# Altium PCB PCB.PcbDoc
Units mil, origin at the board's own origin, x right, y up, seen from the top; angles counter-clockwise.
Board outline 1975 x 1040 mil, 4 copper layers (Layer 1 (SIG), Layer 2 (GND), Layer 3 (GND), Layer 4 (SIG)), stack 62.556 mil thick; 48 components, 30 nets, 188 pads, 72 vias.
Unrouted connection lines stored in the file: 1.
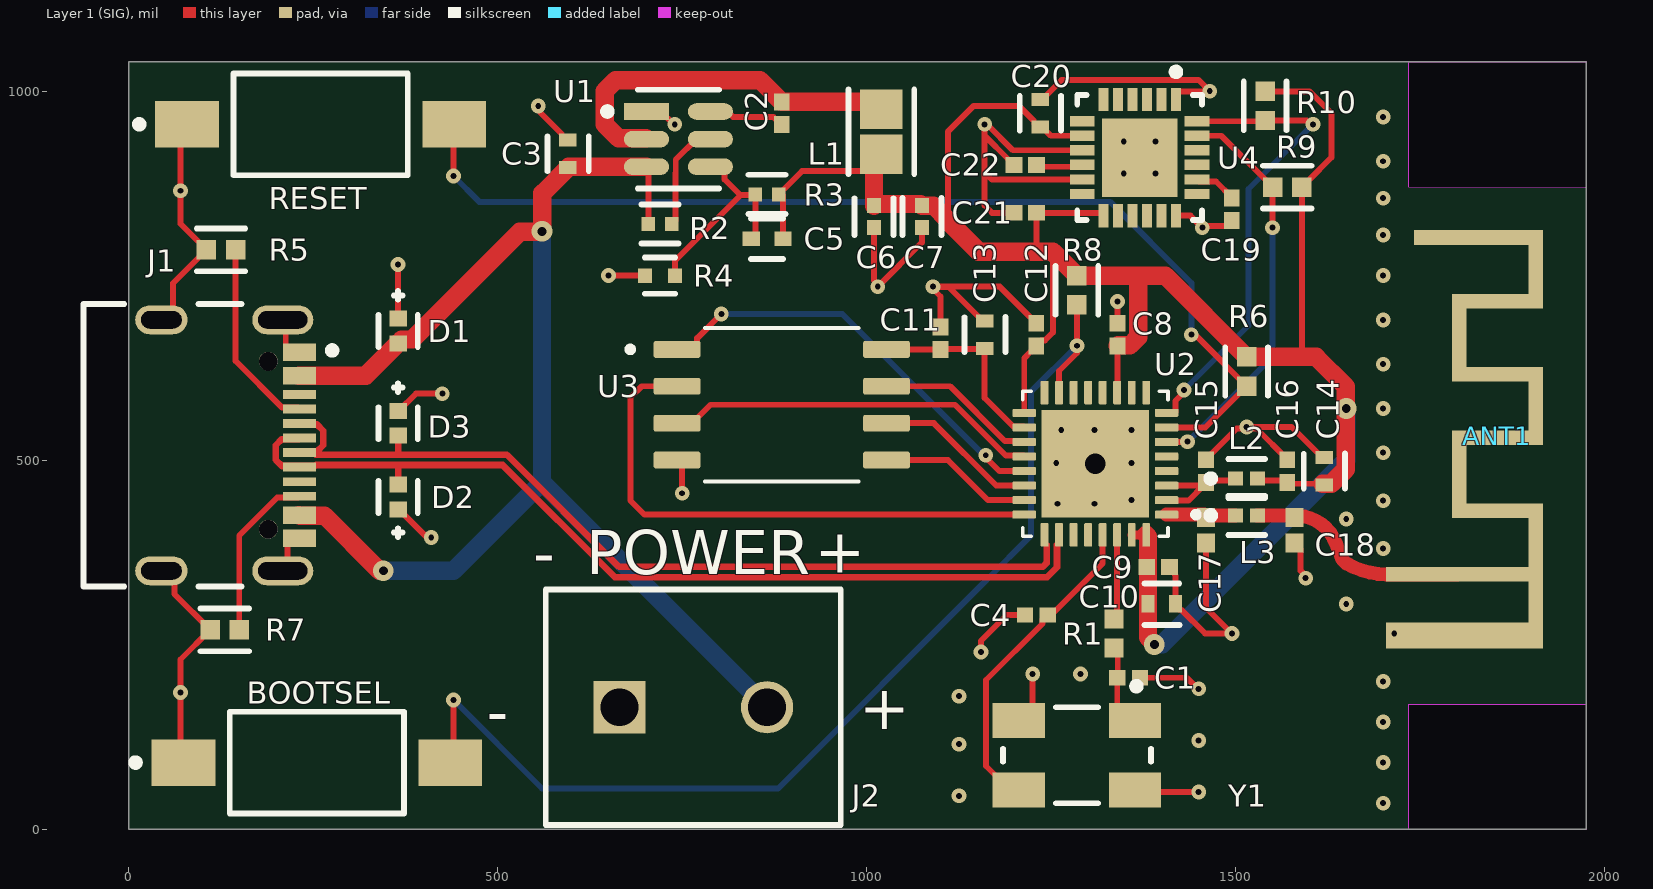
[diagram p0: Layer 1 (SIG) view]
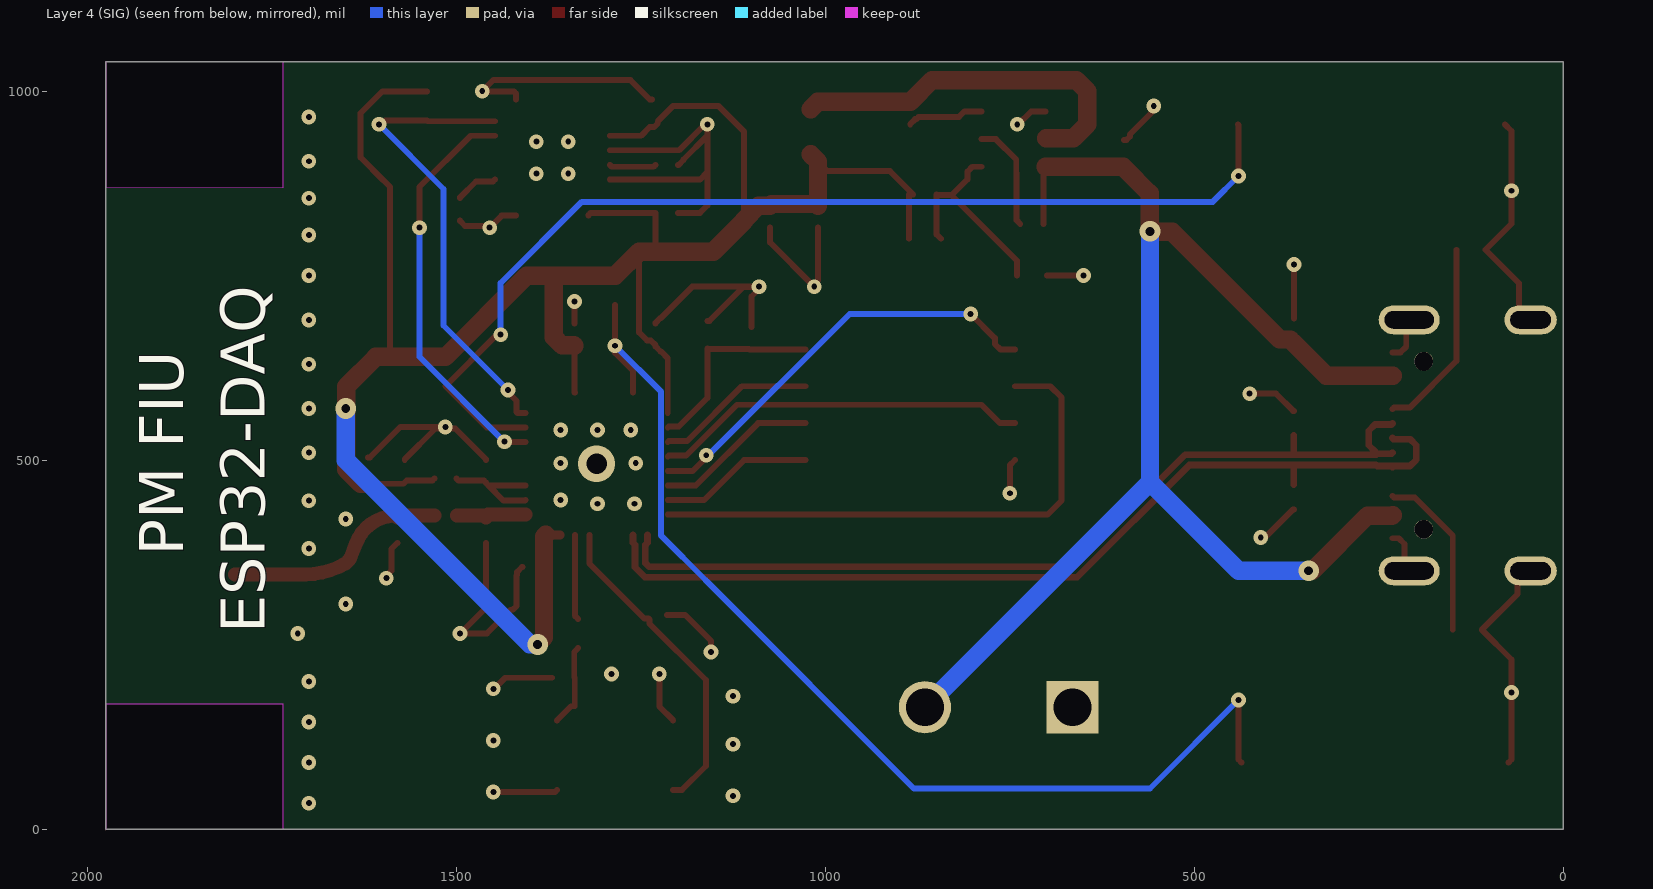
[diagram p1: Layer 4 (SIG) view, seen from below]
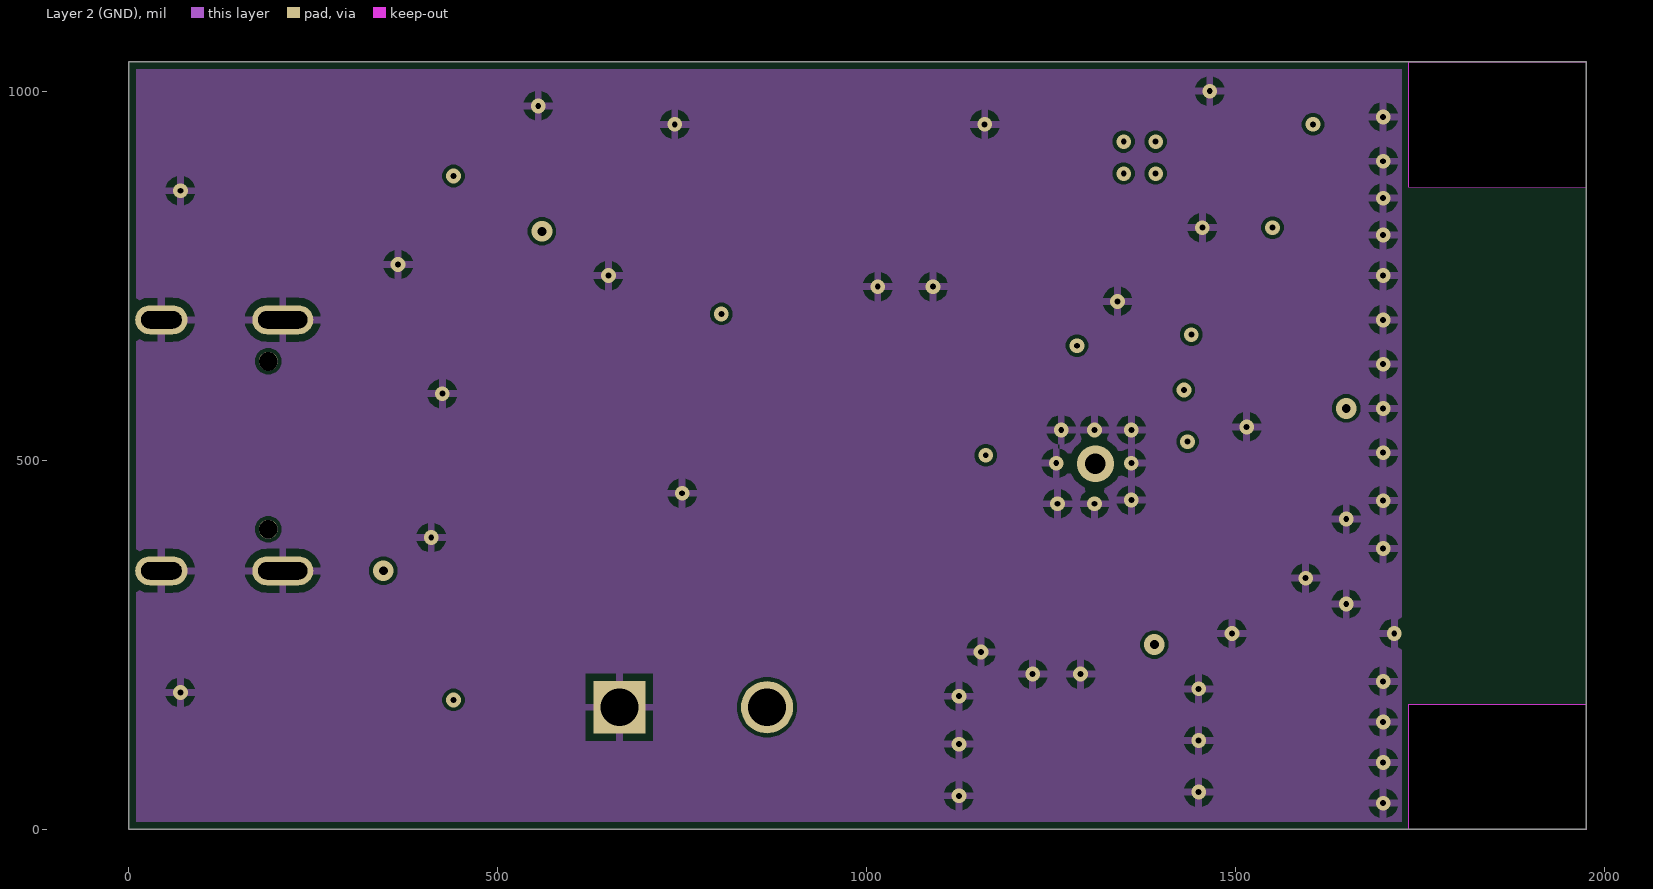
[diagram p2: Layer 2 (GND)]
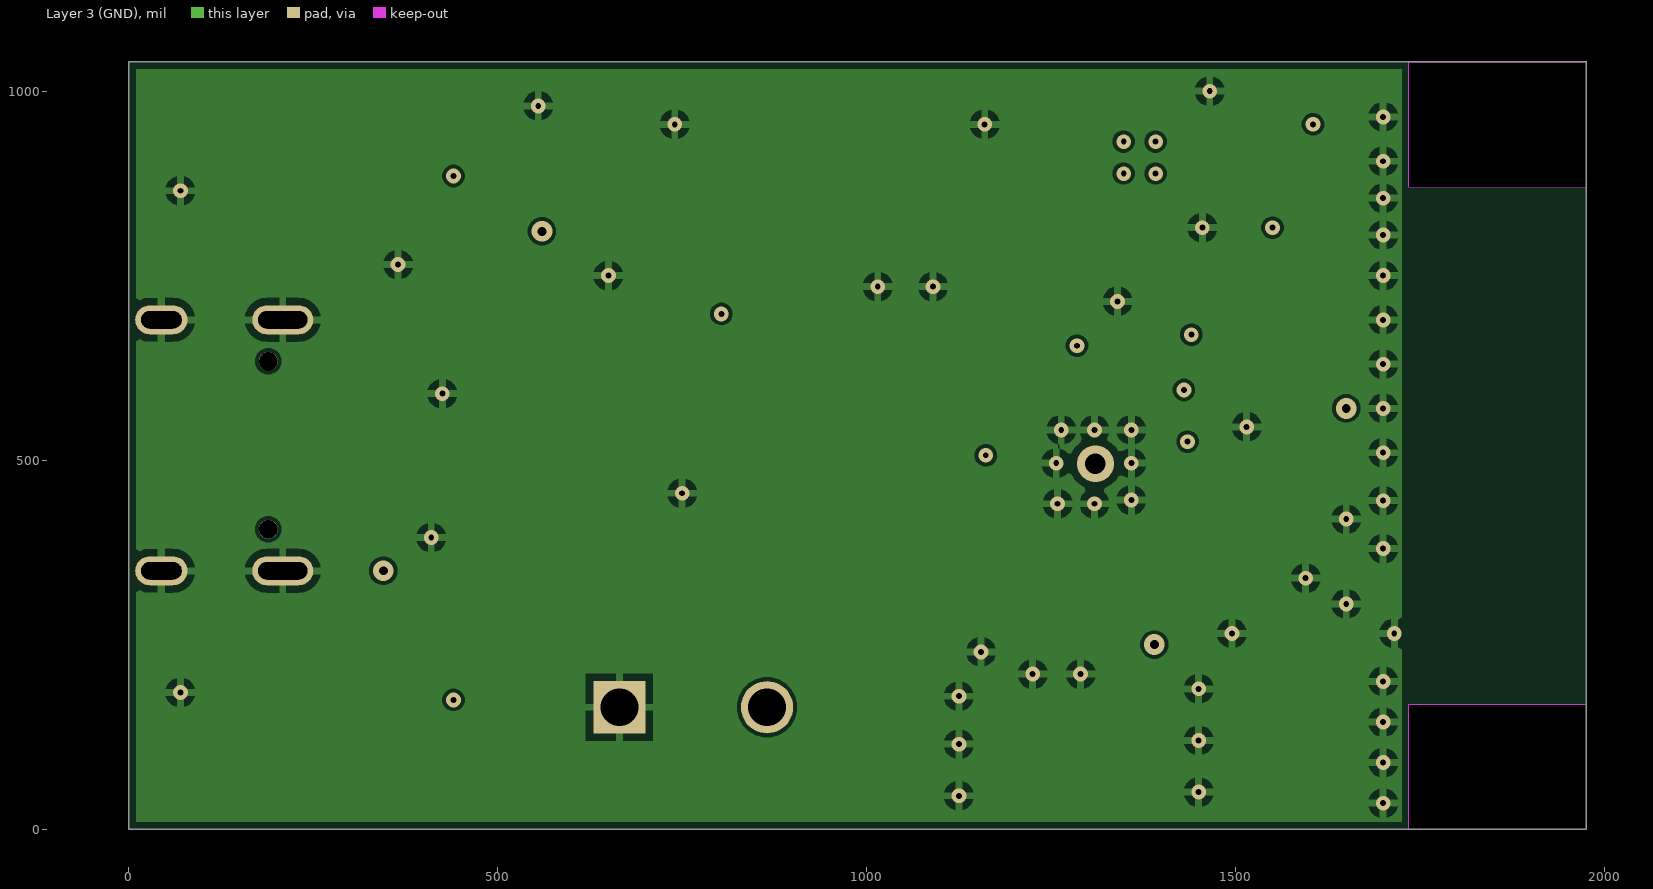
[diagram p3: Layer 3 (GND)]
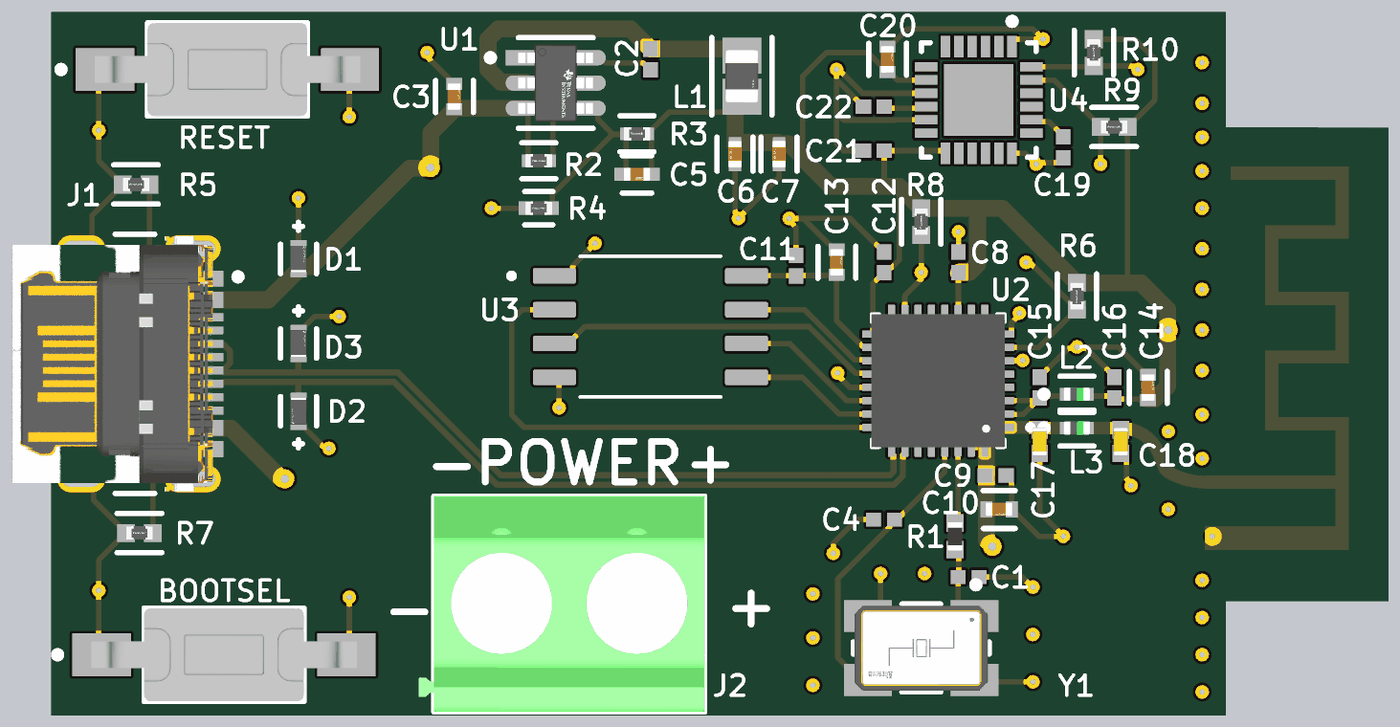
[diagram p4: 3D render of the assembled board from above, using the file's embedded part models]

## Layer stack, top to bottom
Top Solder: solder mask 0.4, Solder Resist, Dk 3.5
Layer 1 (SIG): signal copper 1.4
Dielectric 2: prepreg 10, PP-006, Dk 4.1
Layer 2 (GND): signal copper 1.378
Dielectric 1: dielectric 37, FR-4, Dk 4.8
Layer 3 (GND): signal copper 1.378
Dielectric 3: prepreg 10, PP-006, Dk 4.1
Layer 4 (SIG): signal copper 1.4
Bottom Solder: solder mask 0.4, Solder Resist, Dk 3.5

## Board outline
0,0 0,1040 1975,1040 1975,0
cut-out: 1735,0 1735,169.31 1975,169.31 1975,-1.15
cut-out: 1735,869.98 1735,1032.86 1735,1040 1975,1040 1975,868.82

## Design rules (kind name [scope] priority, off if disabled: settings)
Clearance [All] p1: gap=5 ignorepadtopadclearanceinfootprint=TRUE except(0: Arc-Hole Track-Hole SMDPad-Hole THPad-Hole Via-Hole Fill-Hole Poly-Hole Region-Hole Text-Hole)
DiffPairsRouting [All] p1: maxlimit=10 minlimit=5 mostfreqgap=10 toplayer_maxgap=5 toplayer_prefgap=5 toplayer_minwidth=9 toplayer_maxwidth=9 toplayer_prefwidth=9 midlayer1_mingap=10 midlayer1_minwidth=15 midlayer1_maxwidth=15 midlayer1_prefwidth=15 midlayer2_mingap=10 midlayer2_minwidth=15 midlayer2_maxwidth=15 midlayer2_prefwidth=15 bottomlayer_maxgap=5 bottomlayer_prefgap=5 bottomlayer_minwidth=9 bottomlayer_maxwidth=9 bottomlayer_prefwidth=9 maxuncoupledlength=500
PolygonConnect [All] p1: connectstyle=Relief reliefconductorwidth=10 reliefentries=4 polygonreliefangle="90 Angle" airgapwidth=10
RoutingVias [All] p1: holewidth=12 width=28 viastyle="Through Hole" minholewidth=8 minwidth=20 maxholewidth=28 maxwidth=50
SolderMaskExpansion [All] p1: expansion=4 istentingtop=FALSE
Width [All] p1: maxlimit=25 minlimit=8 preferedwidth=10 toplayer_prefwidth=8 midlayer1_minwidth=10 midlayer1_maxwidth=10 midlayer2_minwidth=10 midlayer2_maxwidth=10 bottomlayer_prefwidth=8 minimp=50.000000 maximp=50.000000 favimp=50.000000
29 further rules are at their usual default settings.

## Classes and differential pairs
differential pair class DATA: DATA
differential pair DATA: +DATA_P -DATA_N

## Components (designator, comment, footprint, x,y, rotation, side; value= is the part's Value field where it differs from the comment)
ANT1 "PCB Antenna 2.4GHz 50Ohm" ANT_IFA_USB_2_4GHZ_50R 1704.06,262.28 r90 top
BOOTSEL "FSMSM" TECO-FSMSM-2_V 255,90 r0 top
C1 "27pF" CAPC1005X55X25LL05T10 1355,205 r0 top
C2 "100nF" CAPC1005X56X25LL10T15 885,970 r270 top
C3 "10uF" FP-GRM15-0_2-MFG 595,915 r90 top
C4 "27pF" CAPC1005X55X25LL05T10 1230,290 r180 top
C5 "56pF" FP-0402-L_1_0_1-W_0_5_0_1-MFG 865,800 r0 top
C6 "22uF" FP-CL746-IPC_C 1010,829.9 r270 top
C7 "22uF" FP-CL746-IPC_C 1075,830 r270 top
C8 "100nF" CAPC1005X56X25LL10T15 1340,670 r90 top
C9 "100nF" CAPC1005X56X25LL10T15 1395,355 r0 top
C10 "10uF" FP-GRM15-0_2-MFG 1400,305 r0 top
C11 "100nF" CAPC1005X56X25LL10T15 1100,665 r90 top
C12 "100nF" CAPC1005X56X25LL10T15 1230,670 r90 top
C13 "10uF" FP-GRM15-0_2-MFG 1160,670 r90 top
C14 "10uF" FP-GRM15-0_2-MFG 1620,485 r90 top
C15 "100nF" CAPC1005X56X25LL10T15 1460,485 r90 top
C16 "100nF" CAPC1005X56X25LL10T15 1570,485 r90 top
C17 "3.3pF" CAPC1005X55X25NL5T10 1460,405 r90 top
C18 "3.3pF" CAPC1005X55X25NL5T10 1580,405 r90 top
C19 "2.2nF" CAPC1005X56X25LL10T15 1495,840 r270 top
C20 "10uF" FP-GRM15-0_2-MFG 1235,970 r90 top
C21 "100nF" CAPC1005X56X25LL10T15 1215,835 r180 top
C22 "100nF" CAPC1005X56X25LL10T15 1215,900 r180 top
D1 "" FP-SLP1006P2-MFG 365,675 r270 top
D2 "" FP-SLP1006P2-MFG 365,450 r90 top
D3 "" FP-SLP1006P2-MFG 365,550 r270 top
J1 "USB4105-GF-A" FP-USB4105-GF-A-MFG 90,520 r270 top
J2 "" PHOE-1729128-2_V 765,165 r0 top
L1 "15uH" FP-MLZ2012-1_25-IPC_B 1020,945 r270 top
L2 "2.2nH" FP-LQG15HH_02-IPC_C 1515,475 r0 top
L3 "2.2nH" FP-LQG15HH_02-IPC_C 1515,425 r0 top
R1 "22R" RESC1005X40X25ML05T05 1335,265 r90 top
R2 "100K" FP-ERJ2RK-IPC_C 720,820 r0 top
R3 "100K" FP-ERJ2RK-IPC_C 865,860 r0 top
R4 "22K" FP-ERJ2RK-MFG 720,750 r0 top
R5 "5K1" FP-ERJ2RK-IPC_A 125,785 r0 top
R6 "5K1" FP-ERJ2RK-IPC_A 1515,620 r90 top
R7 "5K1" FP-ERJ2RK-IPC_A 130,270 r0 top
R8 "5K1" FP-ERJ2RK-IPC_A 1285,730 r90 top
R9 "5K1" FP-ERJ2RK-IPC_A 1570,870 r0 top
R10 "5K1" FP-ERJ2RK-IPC_A 1540,980 r90 top
RESET "FSMSM" TECO-FSMSM-2_V 260,955 r0 top
U1 "TPS54202DDCR" FP-DDC0006A-IPC_B 745,935 r0 top
U2 "ESP32C3" QFN32_5X5MM 1310,495 r180 top
U3 "W25Q128JVSIQ" SOIC127P790X216-8N 885,575 r0 top
U4 "MPU-6050" IS-QFN-24_V 1370,910 r270 top
Y1 "40MHz" FP-ABM3B-MFG 1285,100 r180 top

## Footprints (in the part's own frame and the unit in brackets; to place one, negate y for a bottom-side part, rotate by r counter-clockwise, add the part's x,y. Pads: shape width x height; smd on the part's side, far side on the other; paste and mask are expansions set on the pad)
ANT_IFA_USB_2_4GHZ_50R [mm]
  rect 5x0.5 smd paste-2539.97 mask+0.102: 1(2.05,-5.15)
  rect 0.5x4.9 smd paste-2539.97 mask+0.102: 1(2.1,-2.45)
  rect 0.5x2.64 smd paste-2539.97 mask+0.102: 1(4.3,-3.58) 1(6.8,-3.58) 1(9,-3.58) 1(11.5,-3.58)
  rect 2x0.5 smd paste-2539.97 mask+0.102: 1(5.55,-2.51) 1(10.25,-2.51)
  rect 2.7x0.5 smd paste-2539.97 mask+0.102: 1(7.9,-5.15) 1(12.6,-5.15)
  rect 0.5x3.94 smd paste-2539.97 mask+0.102: 1(13.7,-2.93)
  rect 0.9x4.9 smd paste-2539.97 mask+0.102: 2(0,-2.45)
CAPC1005X55X25LL05T10 [mm] "Chip Capacitor, 2-Leads, Body 1.00x0.50mm, IPC High Density"
  rect 0.56x0.52 smd: 1(-0.39,0) 2(0.39,0)
  body extent -0.53,-0.28 0.53,0.28, height 0.55
CAPC1005X55X25NL5T10 [mm] "Chip Capacitor, 2-Leads, Body 1.05x0.55mm, IPC Medium Density"
  rect 0.66x0.62 smd: 1(-0.44,0) 2(0.44,0)
  body extent -0.53,-0.28 0.53,0.28, height 0.55
CAPC1005X56X25LL10T15 [mm] "Chip Capacitor, 2-Leads, Body 1.00x0.50mm, IPC High Density"
  rect 0.58x0.54 smd: 1(-0.39,0) 2(0.39,0)
  body extent -0.55,-0.3 0.55,0.3, height 0.56
FP-0402-L_1_0_1-W_0_5_0_1-MFG [mm]
  rect 0.6x0.5 smd paste+0 mask+0: 1(-0.55,0) 2(0.55,0)
  silkscreen extent -0.55,-0.7 0.55,0.7, body extent -0.95,-0.4 0.95,0.4, height 0.25
FP-ABM3B-MFG [mm]
  rect 1.8x1.2 smd paste+0 mask+0: 1(-2,-1.2) 2(2,-1.2) 3(2,1.2) 4(-2,1.2)
  silkscreen extent -2.55,-2.5 2.55,1.65, body extent -3,-1.9 3,1.9, height 0.25
FP-CL746-IPC_C [mil]
  rect 20.29x18.6 smd paste+0 mask+0: 1(-14.9,0) 2(14.9,0)
  silkscreen extent -25,-27 25,27, body extent -29,-15 29,15, height 10
FP-DDC0006A-IPC_B [mm]
  rect 1.554x0.572 smd paste+0 mask+0: 1(-1.1,0.95)
  rrect100% 1.554x0.572 smd paste+0 mask+0: 2(-1.1,0) 3(-1.1,-0.95) 4(1.1,-0.95) 5(1.1,0) 6(1.1,0.95)
  silkscreen extent -2.57,-1.7 1.4,1.7, body extent -2.13,-1.7 2.13,1.7, height 0.25
FP-ERJ2RK-IPC_A [mil]
  rect 26.31x26.48 smd paste+0 mask+0: 1(-19.77,0) 2(19.77,0)
  silkscreen extent -33,-29 33,29, body extent -41,-21 41,21, height 10
FP-ERJ2RK-IPC_C [mil]
  rect 18.43x18.6 smd paste+0 mask+0: 1(-15.83,0) 2(15.83,0)
  silkscreen extent -25,-27 25,27, body extent -29,-15 29,15, height 10
FP-ERJ2RK-MFG [mm]
  rect 0.475x0.5 smd paste+0 mask+0: 1(-0.513,0) 2(0.513,0)
  silkscreen extent -0.53,-0.63 0.53,0.63, body extent -0.85,-0.38 0.85,0.38, height 0.25
FP-GRM15-0_2-MFG [mm]
  rect 0.45x0.6 smd paste+0 mask+0: 1(-0.475,0) 2(0.475,0)
  silkscreen extent -0.6,-0.72 0.61,0.7, body extent -0.8,-0.45 0.8,0.45, height 0.25
FP-LQG15HH_02-IPC_C [mil]
  rect 20.29x18.6 smd paste+0 mask+0: 1(-14.9,0) 2(14.9,0)
  silkscreen extent -54,-27 25,27, body extent -29,-15 29,15, height 10
FP-MLZ2012-1_25-IPC_B [mil]
  rect 53.32x57.33 smd paste+0 mask+0: 1(-30.55,0) 2(30.55,0)
  silkscreen extent -57,-44 57,44, body extent -67,-39 67,39, height 10
FP-SLP1006P2-MFG [mm]
  rect 0.55x0.6 smd paste+0 mask+0: 1(-0.425,0) 2(0.425,0)
  silkscreen extent -1.38,-0.67 0.55,0.67, body extent -0.8,-0.45 0.8,0.45, height 0.25
FP-USB4105-GF-A-MFG [mm]
  rrect100% 1x2.1 hole 1.7 slot 0.6 at 0 deg paste-2539.97 mask+0: 1(-4.32,3.015) 2(4.32,3.015)
  rrect100% 1x1.8 hole 1.4 slot 0.6 at 0 deg paste-2539.97 mask+0: 3(-4.32,-1.165) 4(4.32,-1.165)
  rect 0.6x1.15 smd paste+0 mask+0: A1-B12(-3.2,3.59) A4-B9(-2.4,3.59) B1-A12(3.2,3.59) B4-A9(2.4,3.59)
  rect 0.3x1.15 smd paste+0 mask+0: A5(-1.25,3.59) A6(-0.25,3.59) A7(0.25,3.59) A8(1.25,3.59) B5(1.75,3.59) B6(0.75,3.59) B7(-0.75,3.59) B8(-1.75,3.59)
  round 0.65 hole 0.65 unplated paste-2539.97 mask+0: ""(-2.89,2.515) ""(2.89,2.515)
  silkscreen extent -4.86,-3.84 4.86,4.84, body extent -4.96,-3.94 4.96,4.27, height 0.25
IS-QFN-24_V [mm] "QFN, 24-Leads, Body 4x4mm, Pitch 0.5mm, Thermal Pad 2.7x2.6mm"
  rect 0.8x0.35 smd: 1(-2,1.25) 2(-2,0.75) 3(-2,0.25) 4(-2,-0.25) 5(-2,-0.75) 6(-2,-1.25) 13(2,-1.25) 14(2,-0.75) 15(2,-0.25) 16(2,0.25) 17(2,0.75) 18(2,1.25)
  rect 0.35x0.85 smd mask+0.102: 7(-1.25,-1.975) 8(-0.75,-1.975) 9(-0.25,-1.975) 10(0.25,-1.975) 11(0.75,-1.975) 12(1.25,-1.975) 19(1.25,1.975) 20(0.75,1.975) 21(0.25,1.975) 22(-0.25,1.975) 23(-0.75,1.975) 24(-1.25,1.975)
  rect 2.7x2.6 smd: 25(0,0)
  silkscreen extent -3.07,-2.15 2.15,2.15, body extent -2,-2 2,2, height 0.95
PHOE-1729128-2_V [mm] "Receptacle, 2-Leads, Body 8.1x10.16mm, Pitch 5.08mm"
  rect 1.8x1.8 hole 1.3: 1(-2.54,0)
  round 1.8 hole 1.3: 2(2.54,0)
  silkscreen extent -5.08,-4.05 5.08,4.05, body extent -5.65,-4.05 5.08,4.05, height 10.01
QFN32_5X5MM [mm]
  rrect25% 0.81x0.27 smd: 1(-2.45,1.75) 2(-2.45,1.25) 3(-2.45,0.75) 4(-2.45,0.25) 5(-2.45,-0.25) 6(-2.45,-0.75) 7(-2.45,-1.25) 8(-2.45,-1.75) 17(2.45,-1.75) 18(2.45,-1.25) 19(2.45,-0.75) 20(2.45,-0.25) 21(2.45,0.25) 22(2.45,0.75) 23(2.45,1.25) 24(2.45,1.75)
  rrect25% 0.27x0.81 smd: 9(-1.75,-2.45) 10(-1.25,-2.45) 11(-0.75,-2.45) 12(-0.25,-2.45) 13(0.25,-2.45) 14(0.75,-2.45) 15(1.25,-2.45) 16(1.75,-2.45) 25(1.75,2.45) 26(1.25,2.45) 27(0.75,2.45) 28(0.25,2.45) 29(-0.25,2.45) 30(-0.75,2.45) 31(-1.25,2.45) 32(-1.75,2.45)
  rect 3.7x3.7 smd paste-1.4: 33(0,0)
  silkscreen extent -3.56,-2.5 2.5,2.5, body extent -2.5,-2.5 2.5,2.5, height 0.9
RESC1005X40X25ML05T05 [mm] "Chip Resistor, 2-Leads, Body 1.05x0.55mm, IPC Low Density"
  rect 0.65x0.65 smd: 1(-0.5,0) 2(0.5,0)
  body extent -0.53,-0.28 0.53,0.28, height 0.4
SOIC127P790X216-8N [mm]
  rrect25% 1.61x0.58 smd: 1(-3.605,1.905) 2(-3.605,0.635) 3(-3.605,-0.635) 4(-3.605,-1.905) 5(3.605,-1.905) 6(3.605,-0.635) 7(3.605,0.635) 8(3.605,1.905)
  silkscreen extent -5.31,-2.64 2.64,2.64
TECO-FSMSM-2_V [mm] "SMD, 2-Leads, Body 6x3.5mm, Pitch 9.19mm"
  rect 2.2x1.6 smd: 1(-4.595,0)
  rect 2.18x1.6 smd: 2(4.595,0)
  silkscreen extent -6.37,-1.75 3,1.75, body extent -4.98,-1.75 4.98,1.75, height 4.4

## Part data
ANT1: library part ANT_IFA_USB_2_4GHZ_50R, "Inverted F 2.4GHz ISM PCB Antenna 50 Ohm", ComponentLink1Description=Datasheet, ComponentLink1URL=https://www.ti.com/lit/an/swra117d/swra117d.pdf
BOOTSEL RESET: library part CMP-2000-07511-1, "FSMSM Push Button Switch, 50 mA, -35 to 85 degC, 2-Pin SMD, RoHS, Bulk", Case\/Package=SMD/SMT, Contact Current Rating=50mA, Contact Resistance=100mOhm, Manufacturer="TE Connectivity", Max Operating Temperature=85degC, Max Voltage Rating (DC)=12V, Min Operating Temperature=-35degC, Operating Force=180gf, Package Description="2-Pin Surface Mount Device, Body 6 x 3.5 mm, Pitch 9.19 mm", Package Quantity=1000, Voltage Rating (DC)=24V, Actuator Length=1.07mm, Actuator Material=Polyamide, Contact Material=Brass, Contact Plating=Silver, Current Rating=50mA, Datasheet URL=http://www.te.com/commerce/DocumentDelivery/DDEController?Action=showdoc&DocId=Customer+Drawing%7F1437566-3%7FC2%7Fpdf%7FEnglish%7FENG_CD_1437566-3_C2_1437566_3_1_c.dwg.pdf%7F1437566-3, Datasheet Version="Rev. C2, 08/2014", Electrical Life=20000Cycles, ELV=Compliant, Illumination Type=Illuminated, Lead Free=LeadFree, Manufacturer URL=http://www.te.com/, Mechanical Life=20000Cycles, Mount=SurfaceMount, Mounting Technology=SurfaceMount, Orientation=Straight, Package Reference=FSMSM, Packaging=LoosePiece, REACH SVHC=Unknown, RoHSCompliant=true, Switch Travel=0.25mm, Termination=GullWing, Throw Configuration=SPST
C1 C4: library part CMP-2008-03917-1, Manufacturer=Murata, Part Number=GRM1555C1H270JA01D
C2 C8 C9 C11 C12 C15 C16 C21 C22: library part CMP-2008-02743-1, Manufacturer="AVX Interconnect / Elco", Part Number=04026D104KAT2A
C3 C10 C13 C14 C20: library part CMP-06035-000074-1, "CAP CER 10UF 6.3V X6S 0402", Manufacturer=Murata, Manufacturer Part Number=GRM155C80J106ME11D, Package=GRM15-0.2, Temperature="-55°C to +105°C", Temperature Characteristic=X6S, Temperature Coefficient=22%, Temperature Range High=+105°C, Temperature Range Low=-55°C, Tolerance=20%, Voltage Rating=6.3V, Automotive=No, Capacitance=10uF, Category=Cap, ComponentLink2Description=Datasheet, ComponentLink2URL=https://search.murata.co.jp/Ceramy/image/img/A01X/G101/ENG/GRM155C80J106ME11-01.pdf, Device Class L1="Passive Components", Device Class L2=Capacitors, Device Class L3="Ceramic Capacitors", Digikey Description="CAP CER 10UF 6.3V X6S 0402", Height=0.7mm, Ipc Land Pattern Name=CAPC10050X50, Lead Free=Yes, Material=Ceramic, Mouser Description="Cap Ceramic 10uF 6.3V X6S 20% Pad SMD 0402 105C T/R", Octopart=https://octopart.com/grm155c80j106me11d-murata-71220993, RoHS=TRUE
C5: library part CMP-2008-02663-2, "General Purpose Ceramic Capacitor, 0402, 56pF, 5%, C0G, 30ppm/°C, 50V", Case Code (Imperial)=0402, Case Code (Metric)=1005, Dielectric=C0G, Dielectric Material=Ceramic, Max Operating Temperature=125°C, Min Operating Temperature=-55°C, Package Quantity=1, Temperature Coefficient=0ppm/°C, Tolerance=5%, Voltage=50V, Capacitance=56pF, Case/Package=0402, Construction=Flat, Contact Plating=Tin, Depth=0.5mm, Height=0.5mm, Lead Free="Lead Free", Length=1mm, Mount="Surface Mount", Number of Pins=2, Packaging="Tape and Reel", Radiation Hardening=No, REACH SVHC="No SVHC", RoHS Compliant=Yes, Series=-, Termination=SMD/SMT, Thickness=0.022inch, Voltage Rating=50V, Voltage Rating (DC)=50V, Width=0.02inch
C6 C7: library part CMP-13271-000286-1, "Cap Ceramic 22uF 6.3V X5R ±20% SMD 0402 +85°C Paper T/R", Case Code (Imperial)=0402, Case Code (Metric)=1005, Max Operating Temperature=85°C, Min Operating Temperature=-55°C, Tolerance=20%, Voltage Rating=6.3V, Capacitance=22uF, Case/Package=0402, Length=0.039inch, Mount="Surface Mount", Packaging="Tape and Reel", Thickness=0.022inch, Width=0.02inch
C17 C18: library part CMP-1034-00264-3, "Chip Capacitor, 3.3 pF, +/- 0.25 pF, 50 V, -55 to 125 degC, 0402 (1005 Metric), RoHS, Tape and Reel", Capacitance="3.3 pF", Case Code (Imperial)=0402, Case Code (Metric)=1005, Max Operating Temperature="125 degC", Min Operating Temperature="-55 degC", Package Quantity=10000, PartNumber=GRM1555C1H3R3CA01D, Type (Capacitors)=C0G, Voltage Rating="50 V", Case/Package=0402, ComponentLink1Description="Manufacturer URL", ComponentLink1URL=http://www.murata.com/, ComponentLink2Description=Datasheet, ComponentLink2URL=http://search.murata.co.jp/Ceramy/image/img/A01X/G101/ENG/GRM1555C1H3R3CA01-01.pdf, DatasheetVersion=03/2016, Height="0.5 mm", Length="0.039 inch", Mount="Surface Mount", Mounting Technology="Surface Mount", PackageDescription="2-Pin Surface Mount Device, Body 1 x 0.5 mm", Packaging="Tape and Reel", Radiation Hardening=No, REACH SVHC="No SVHC", RoHSCompliant=true, Voltage Rating (DC)="50 V", Width="0.02 inch"
C19: library part CMP-2008-02907-1, Manufacturer="AVX Interconnect / Elco", Part Number=04025C222JAT2A
D1 D2 D3: library part CMP-56445-000005-1, "TVS DIODE 33VWM 60VC SLP1006P2", Case Code (Imperial)=0402, Case Code (Metric)=1006, Case/Package=SMD/SMT, Clamping Voltage=60V, Leakage Current=1uA, Max Breakdown Voltage=45V, Max Operating Temperature=125°C, Min Breakdown Voltage=36V, Min Operating Temperature=-40°C, Peak Pulse Current=2A, Peak Pulse Power=125W, Power Dissipation=170W, Power Line Protection=No, Resistor Type=Zener, Reverse Standoff Voltage=33V, Clamping Voltage-Max=60V, Depth=0.6mm, Diode Type=ZENER, Direction=Unidirectional, Element Configuration=Single, Lead Free="Lead Free", Length=1mm, Mount="Surface Mount", Number of Pins=2, Number of Unidirectional Channels=1, Packaging="Tape and Reel", Radiation Hardening=No, RoHS Compliant=Yes, Series="Automotive, AEC-Q100, uClamp®", Working Voltage=33V
J1: library part CMP-245163-000001-1, "CONN RCPT USB2.0 TYPEC 5A", Current Rating=5/6.25/1.25/0.25A, Manufacturer=GCT, Package=0, Temperature="-40°C to +85°C", Temperature Range High=+85°C, Temperature Range Low=-40°C, Voltage Rating=20V, Automotive=No, Category=Conn, ComponentLink2Description=Datasheet, ComponentLink2URL=https://gct.co/files/drawings/usb4105.pdf, Conn Orientation="Right Angle", Contact Material=Gold,Nickel, Device Class L1=Connectors, Device Class L2="USB Connectors", Device Class L3=unset, Digikey Description="CONN RCPT USB2.0 TYPEC 5A", Height=3.46mm, Is Female=yes, Lead Free=Yes, Manufacturer Part Number=USB4105-GF-A, Number of Contacts=16, Octopart=https://octopart.com/usb4105-gf-a-gct-106627878, RoHS=TRUE, USB Standard="USB 2.0"
J2: library part CMP-2000-05815-1, "PCB Terminal Block, 13.5 A, 400 V, 2-Pin THD, RoHS, Bulk", Current Rating=13500mA, Manufacturer="Phoenix Contact", Package Description="2-Pin Through Hole Device, Body 8.1 x 10.16 mm, Pitch 5.08 mm", Package Reference=1729128-2, Package Version=03/2015, PartNumber=1729128, Voltage Rating=400V, Datasheet URL=https://datasheet.ciiva.com/16046/1729128-16046181.pdf, Datasheet Version=12/2013, Manufacturer URL=http://www.phoenixcontact.com/, Mounting Technology=ThroughHole, No. of Positions=2, No. of Rows=1, Orientation=Horizontal, Package URL=https://www.phoenixcontact.com/online/portal/pi/pxc/product_detail_page/!ut/p/b1/3VdJjqNKFDxLH8AFycySyWY2ozFsEPOMMQaDOX1XedGL_1Vdm5YXJleknhSKeBkvI6EA8ncAo3AYoDhBQGco6KN7VURTdemj9us_IEKEZo_YHiPAEWEFmDGOHMORkqKYCORBZxgL7ZoaZYcbFFUZ3fqxSY6GOuxydWUuHqz1ynmMFygu583Bob0Ewr6Sd_l-5m-kAueHiB0jpRwZwe58wwtkpxtMYd_LmGcDRU02dRNEyWt6Y2ti5pSyJ_reIkzIulrqApdnbT11V5jnCKbYNCvhEM1MCpPByat_X379-iThf08CI5GfOPqfBeS3BRoBOdD55AKVv0iLwCMq-2BrzXWSGRH7pUGD9uwXQjiph3xL0DKQwdGa0JImiIOmBNOestqgwTHSSs2oOep-78apyXQBvNi8ZLaFjvjWvcaUEBu0MC6Wbe-d6mB0FAebo2lUWinqYaZs5DAYzV0RP9yitUjnGJ0iI9xhZkT42OCQNUJJhkgWINNQLP2JFP6OpMg3JCVg70jqHT0lvKOnhHf0lPuOnnLf0VPuWx6_dxwUIvwk5WMkT0kLL1mh61l2yZVSzG3pYV_bqo-mj6uMKwKwdnnW8Jh5RTOJzMOA5c-eJDaZQw4mTMPH02PvS_ZAqNVjVTo2WyYLkwH_KU1mmmG5kjRhDqPXLwwVHvVOjCM60-fpXvTDfMGW1PVFVS1r4e4yVDk4ZdNbkUHvqPqQSeian4UD39fNKmachqdJ1NJbyk8rXT9mXTvPk3oE5meulKGgiruPJek-4I9hTT6G8ZLOyRSm2RRVbThERQad5OS28hdt4YW4vG0stgYYzsWsK4_7y6DZMjJSCqri1kyiZR5vD7pwIrNR7QwPHTcLTI5qT7eRlpHrdGiupYlqQDJ7zy_CND8fWWBoLRXxk1RVcXiBQwbTD4Xi7KL-FuO94t9xaqweXzH, Packing=Bulk, Pitch=5.08mm, RoHS=TRUE
L1: library part CMP-08253-000108-1, "Shielded Multilayer Inductor 15uH ±20% 350mA 611mΩ SMD 0805", Case Code (Imperial)=0805, Case Code (Metric)=2012, Current Rating=350mA, DC Resistance (DCR)=611mR, Max Operating Temperature=125°C, Min Operating Temperature=-55°C, Package Quantity=1, Saturation Current=90mA, Self Resonant Frequency=40MHz, Test Frequency=2MHz, Tolerance=20%, Case/Package=0805, Core Material=Ferrite, Height - Seated (Max)=0.057inch, Inductance=15uH, Length=0.079inch, Mount="Surface Mount", Packaging="Tape and Reel", RoHS Compliant=Yes, Shielding=Shielded, Width=0.049inch
L2 L3: library part CMP-1662-00024-2, "Multilayer type RF Inductor 2.2nH ±0.3nH 0.09Ω 900mA 0402", Case Code (Imperial)=0402, Case Code (Metric)=1005, Current Rating=300mA, DC Resistance (DCR)=150mR, Max Operating Temperature=125°C, Min Operating Temperature=-55°C, Package Quantity=10000, Self Resonant Frequency=6GHz, Test Frequency=100MHz, Case/Package=0402, Core Material=Air, DC Current=300mA, Depth=0.55mm, Height=0.02inch, Height - Seated (Max)=0.022inch, Inductance=2.2nH, Lead Free="Lead Free", Length=1mm, Max DC Current=300mA, Military Standard=Not, Mount="Surface Mount", Number of Pins=2, Packaging="Tape and Reel", Q Factor=8, Radiation Hardening=No, REACH SVHC="No SVHC", Shielding=Unshielded, Termination=SMD/SMT, Width=0.02inch
R1: library part CMP-2002-01135-4, "Chip Resistor, 22 Ohm, +/- 1%, 0.1 W, -55 to 155 degC, 0402 (1005 Metric), RoHS, Tape and Reel", Case Code (Imperial)=0402, Case Code (Metric)=1005, Max Operating Temperature="155 degC", Min Operating Temperature="-55 degC", Package Quantity=10000, PartNumber=ERJ-2RKF22R0X, Power Rating="100 mW", Resistance="22 Ohm", Tolerance=1%, Voltage Rating="50 V", Case\/Package=0402, ComponentLink1Description="Manufacturer URL", ComponentLink1URL=http://www.panasonic.com/, ComponentLink2Description=Datasheet, ComponentLink2URL=http://industrial.panasonic.com/cdbs/www-data/pdf/RDA0000/AOA0000C86.pdf, DatasheetVersion=04/2015, Height="0.35 mm", Length="1 mm", Mount="Surface Mount", Mounting Technology="Surface Mount", PackageDescription="2-Pin Surface Mount Device, Body 1 x 0.5 mm", PackageReference=0402, Packaging="Tape and Reel", Pins=2, REACH SVHC=Yes, RoHSCompliant=true, Weight=2.8E-05oz, Width="0.5 mm"
R2 R3: library part CMP-2002-00608-4, "RES SMD 100K OHM 1% 1/10W 0402", Case Code (Imperial)=0402, Case Code (Metric)=1005, Max Operating Temperature=155°C, Max Power Dissipation=100mW, Min Operating Temperature=-55°C, Package Quantity=1, Resistance=100kR, Temperature Coefficient=100ppm/°C, Tolerance=1%, Voltage Rating=50V, Case/Package=0402, Composition="Thick Film", Contact Plating=Tin, Depth=0.5mm, Features="Automotive AEC-Q200", Height=0.35mm, Lead Free="Lead Free", Length=1mm, Military Standard=Not, Mount="Surface Mount", Number of Pins=2, Number of Terminations=2, Packaging="Tape and Reel", Power Rating=100mW, Radiation Hardening=No, REACH SVHC="No SVHC", Termination=SMD/SMT, Voltage Rating (DC)=50V, Width=0.5mm
R4: library part CMP-2002-01133-2, "RES SMD 22K OHM 1% 1/10W 0402", Case Code (Imperial)=0402, Case Code (Metric)=1005, Max Operating Temperature=155°C, Max Power Dissipation=100mW, Min Operating Temperature=-55°C, Package Quantity=10000, Resistance=22kR, Temperature Coefficient=100ppm/°C, Tolerance=1%, Voltage Rating=50V, Case/Package=0402, Composition="Thick Film", Contact Plating=Tin, Depth=0.5mm, Height=0.35mm, Lead Free="Lead Free", Length=1mm, Military Standard=Not, Mount="Surface Mount", Number of Pins=2, Number of Terminations=2, Packaging="Tape and Reel", Power Rating=100mW, Radiation Hardening=No, REACH SVHC="No SVHC", Termination=SMD/SMT, Voltage Rating (DC)=50V, Width=0.02inch
R5 R6 R7 R8 R9 R10: library part CMP-2002-01158-2, "RES SMD 5.1K OHM 1% 1/10W 0402", Case Code (Imperial)=0402, Case Code (Metric)=1005, Max Operating Temperature=155°C, Max Power Dissipation=100mW, Min Operating Temperature=-55°C, Package Quantity=10000, Resistance=5.1kR, Resistance Tolerance=1%, Resistor Type="Thick Film", Temperature Coefficient=100ppm/°C, Voltage Rating=50V, Case/Package=0402, Construction=Rectangular, Contact Plating=Tin, Depth=0.5mm, Height=0.35mm, Lead Free="Lead Free", Length=1mm, Military Standard=Not, Mount="Surface Mount", Number of Terminations=2, Packaging="Tape and Reel", Power Rating=100mW, REACH SVHC="No SVHC", RoHS Compliant=Yes, Series=ERJ, Technology="THICK FILM", Termination=SMD/SMT, Tolerance=1%, Voltage Rating (DC)=50V, Weight=2.8E-05oz, Width=0.5mm
U1: library part CMP-04918-000439-1, "IC REG BUCK ADJ 2A TSOT23-6", Case/Package=SOT-23-6, Max Input Voltage=28V, Max Operating Temperature=125°C, Min Input Voltage=4.5V, Min Operating Temperature=-40°C, Min Output Voltage=596mV, Output Current=2A, Quiescent Current=40uA, Switching Frequency=500kHz, Lead Free="Lead Free", Max Output Voltage=28V, Mount="Surface Mount", Number of Outputs=1, Output Configuration=Positive, Output Type=Adjustable, Packaging="Tape and Reel", RoHS Compliant=Yes, Synchronous Rectifier=Yes
U2: "WiFi Modules (802.11) (Engineering Samples Only) SMD IC ESP32-C3, RISC-V single-core MCU, 2.4G Wi-Fi & BLE 5.0 combo, QFN 32-pin, 5*5 mm, 40 ~ 105C", Package="VFQFN-32 Espressif Systems", Check_prices=https://www.snapeda.com/parts/ESP32-C3/Espressif+Systems/view-part/?ref=eda, MF="Espressif Systems", MP=ESP32-C3, SnapEDA_Link=https://www.snapeda.com/parts/ESP32-C3/Espressif+Systems/view-part/?ref=snap
U3: "FLASH - NOR Memory IC 128Mb (16M x 8) SPI - Quad I/O, QPI, DTR 133 MHz 8-SOIC", Package="SOIC-8 Winbond", Availability="In Stock", Check_prices=https://www.snapeda.com/parts/W25Q128JVSIQ/Winbond+Electronics/view-part/?ref=eda, MF="Winbond Electronics", MP=W25Q128JVSIQ, Price=None, Purchase-URL=https://pricing.snapeda.com/search/part/W25Q128JVSIQ/?ref=eda, SnapEDA_Link=https://www.snapeda.com/parts/W25Q128JVSIQ/Winbond+Electronics/view-part/?ref=snap
U4: library part CMP-1753-00002-2, "3-Axis Gyroscope, Accelerometer and a Digital Motion Processor(TM) (DMP), 2.375 to 3.46 V, -40 to 85 degC, 24-Pin QFN, RoHS, Tape and Reel", Manufacturer=InvenSense, Standard Package=5,000, Category=Sensors,Transducers, Datasheet URL=http://datasheet.octopart.com/MPU-6050-InvenSense-datasheet-14421344.pdf, Datasheet Version="Rev. 3.3, 05/2012", Dynamic Catalog=MPU-6000™Series, Family=Multifunction, Featured Product=MPU-60506-Axis,IntegratedI²CSolution, Manufacturer URL=http://www.invensense.com/, Online Catalog=MPU-6000™Series, Other Names="1428-1007-2 / MPU6050", Output Type=Digital, Sensor Type=MotionTracking, Unit PriceUSD=Digital
Y1: library part CMP-1688-00006-2, "Crystal 40MHz ±20ppm 18pF SMD-4 5mm x 3.2mm", Case/Package=SMD/SMT, ESR (Equivalent Series Resistance)=50R, Frequency Stability=50ppm, Frequency Tolerance=20ppm, Load Capacitance=18pF, Max Operating Temperature=70°C, Min Operating Temperature=-20°C, Operating Frequency="40 MHz", Package Quantity=1000, Resistor Type=Ceramic, Frequency=40MHz, Height=0.043inch, Lead Free="Lead Free", Length=0.197inch, Mount="Surface Mount", Number of Pins=4, Packaging="Tape and Reel", Series=ABM3B, Termination=SMD/SMT, Tolerance=20ppm, Width=0.126inch

## Via types
v1: diameter 20, hole 8, Layer 1 (SIG) to Layer 4 (SIG), 63 vias
v2: diameter 19.68, hole 7.87, Layer 1 (SIG) to Layer 4 (SIG), 4 vias
v3: diameter 28, hole 12, Layer 1 (SIG) to Layer 4 (SIG), 4 vias
v4: diameter 50, hole 28, Layer 1 (SIG) to Layer 4 (SIG), 1 vias

## Nets (pads, with @x,y where several pads share a name; then routed paths per layer and width w, separated by ;. In a path a pad name is that pad's centre, name@x,y a point inside that pad or via, vN(x,y) a via of type N, cw(c..) or ccw(c..) an arc to the next point about the centre after c; other vN are vias at no path point)
3V3_RF: C15.1 L2.1 U2.2 U2.3 | length 156.2
  Layer 1 (SIG) w8: U2.2 1407.24,445 1436.14,445 1456.22,465.08 1460,468.86 C15.1 1462.68,472.32 1497.42,472.32 L2.1 ; U2.3 C15.1@1455.83,465.47
BOOT: C2.2 U1.6 | length 104.5
  Layer 1 (SIG) w8: U1.6 811.58,972.4 819.05,964.94 873.68,964.94 876.56,962.06 878.37,962.06 885,955.43 C2.2
BOOTSEL: BOOTSEL.2 R8.1 U2.15 | length 1473
  Layer 1 (SIG) w8: BOOTSEL.2 440,94.09 v1(440,175) ; U2.15 1260.79,620.79 1285,645 v1(1285,655) R8.1
  Layer 4 (SIG) w8: v1(440,175) 560,55 880,55 1160.7,335.7 1162.43,337.43 1222.57,397.57 1222.57,592.57 v1(1285,655)
DATA_N: D3.2 J1.A7 J1.B7 U2.25 | length 1212
  Layer 1 (SIG) w9: J1.A7 232.74,508.75 252.29,508.75 253.72,507.32 365,507.32 ; J1.B7 232.74,548.12 255.04,548.12 263.48,539.68 263.48,520 255.04,511.56 ; D3.2 365,507.32 ; U2.25 1241.1,387.91 1243.94,385.07 1243.94,360.51 1238.67,355.24 664.56,355.24 512.48,507.32 365,507.32
DATA_P: D2.2 J1.A6 J1.B6 U2.26 | length 1260.1
  Layer 1 (SIG) w9: J1.A6 229.93,528.44 207.64,528.44 199.2,520 199.2,500.32 207.64,491.88 229.93,491.88 J1.B6 232.74,491.88 252.29,491.88 253.72,493.32 365,493.32 ; D2.2 365,493.32 ; U2.26 1260.79,387.91 1257.94,385.07 1257.94,354.71 1244.47,341.24 658.76,341.24 506.69,493.32 365,493.32
EN: R2.2 U1.5 | length 148.1
  Layer 1 (SIG) w8: R2.2 740.83,825 740.83,888.76 741.28,889.21 741.28,907.3 768.98,935 U1.5
FB: C5.1 R3.1 R4.2 U1.4 | length 291.5
  Layer 1 (SIG) w8: R4.2 740.18,770.18 828.98,858.98 ; U1.4 800.74,897.6 807.45,890.89 807.45,880.5 828.98,858.98 ; C5.1 849.17,805.82 R3.1 848.14,858.98 828.98,858.98
GND: ANT1.2 BOOTSEL.1 C1.2 C3.2 C4.2 C6.2 C7.2 C8.2 C9.2 C10.2 C11.2 C12.2 C13.2 C14.2 C15.2 C16.2 C17.1 C18.1 C19.2 C20.2 C21.2 C22.2 D1.1 D2.1 D3.1 J1.1 J1.2 J1.3 J1.4 J1.A1-B12 J1.B1-A12 J2.1 R4.1 R5.1 R7.1 RESET.1 U1.1 U2.33 U3.4 U4.1 U4.9 U4.11 U4.18 Y1.2 Y1.4 | length 3487.2
  Layer 1 (SIG) w8: J1.4 47.59,349.92 62.08,335.43 62.08,318.24 110.23,270.08 R7.1 110.23,269.92 70,229.68 v1(70,185) 70,94.09 BOOTSEL.1 ; J1.3 45.39,690.08 59.88,704.57 59.88,739.65 R5.1 105.23,785.08 70,820.32 v1(70,865) 70,945.91 RESET.1 ; J1.2 215,356.22 215,386.2 222.81,394.02 J1.B1-A12 ; J1.1 212.7,686.08 212.7,653.8 220.51,645.98 J1.A1-B12 ; D2.1 365.98,433.27 401.96,397.3 407.7,397.3 v1(410,395) ; D3.1 365.98,566.73 389.25,590 v1(425,590) ; D1.1 v1(365,765) ; v1(555,980) 557.3,977.7 557.3,971.4 587.19,941.51 587.19,938.56 592.05,933.7 C3.2 ; v1(650,750) R4.1 ; U1.1 721.02,972.4 738.42,955 v1(740,955) ; U3.4 750,493.07 v1(750,455) ; C6.2 1010,743.25 1015,738.25 v1(1015,735) 1075,795 C7.2 ; C11.2 1100,721.75 1090,731.75 v1(1090,735) 1090.25,734.75 1100.62,734.75 ; v1(1155,240) 1155.06,240.06 1155.06,255.06 1190,290 C4.2 ; C13.2 1157.05,688.7 1111,734.75 1100.62,734.75 ; 1160,939.65 1192.23,907.42 1192.23,906.63 1198.86,900 C22.2 ; C21.2 1170,835 1160,845 1160,890 ; Y1.2 1225,165.98 v1(1225,210) ; C12.2 1230,686.14 1223.37,692.77 1222.58,692.77 1180.35,735 1100.87,735 1100.62,734.75 ; C20.2 1237.95,988.7 1264.25,1015 1450,1015 v1(1465,1000) 1464.75,999.75 1422.1,999.75 1419.21,996.86 U4.1 ; U4.11 1247.41,880.47 1247.31,880.37 1169.63,880.37 1160,890 ; U4.9 1198.19,919.84 1163.03,955 v1(1160,955) 1160,890 ; C8.2 v1(1340,715) ; Y1.4 1366.5,50 v1(1450,50) ; C1.2 1433.89,205 1448.89,190 v1(1450,190) ; C9.2 1411.14,355 1417.77,348.37 1417.77,344.61 1418.7,343.68 1418.7,302.05 1423.56,297.19 1426.51,297.19 1458.7,265 v1(1495,265) 1460,300 C17.1 ; U4.18 1438.74,831.26 v1(1455,815) 1457.3,817.3 1488.37,817.3 1495,823.93 C19.2 ; C15.2 1460,501.14 1501.56,542.7 1512.7,542.7 v1(1515,545) ; C16.2 1570,501.14 1528.44,542.7 1517.3,542.7 v1(1515,545) ; C18.1 1588.2,379.47 1588.2,350.04 1595,343.25 v1(1595,340) ; C14.2 1617.05,503.7 1575.75,545 v1(1515,545)
  other v1: 1700,35 1125,45 1700,90 1125,115 1450,120 1700,145 1125,180 1700,200 1290,210 1715,265 1650,305 1700,380 1650,420 1258.74,440.8 1308.74,440.8 1700,445 1358.74,445.8 1257.01,495.82 1358.74,495.8 1700,510 1263.74,540.8 1308.74,540.8 1358.74,540.8 1700,570 1700,630 1700,690 1700,750 1700,805 1700,855 1700,905 1700,965
  other v4: 1310,495
I2C_SCL: R9.1 U2.6 U4.23 | length 552.8
  Layer 1 (SIG) w8: U2.6 1406.69,524.76 1434.76,524.76 v1(1435,525) ; U4.23 1480.79,939.53 1550.23,870.08 R9.1 1550,869.77 v1(1550,815)
  Layer 4 (SIG) w8: v1(1435,525) 1550,640 v1(1550,815)
I2C_SDA: R10.1 U2.8 U4.24 | length 639.4
  Layer 1 (SIG) w8: U2.8 1417.09,563.9 1418.4,565.21 1418.4,580.15 1430,591.75 v1(1430,595) ; U4.24 1538.98,959.21 R10.1 1596.52,960.23 1601.75,955 v1(1605,955)
  Layer 4 (SIG) w8: v1(1430,595) 1517.5,682.5 1517.5,867.5 v1(1605,955)
LNA_IN: C17.2 L3.1 U2.1 | length 95.7
  Layer 1 (SIG) w18.7: U2.1 1457.01,426.1 C17.2@1460,423.11 ; C17.2 C17.2@1460,423.11 ; L3.1@1499.3,425 1461.89,425 C17.2@1460,423.11
NetC1_1: C1.1 R1.1 Y1.1 | length 113.1
  Layer 1 (SIG) w8: R1.1 1340.31,240.01 1340.31,205.66 C1.1 1339.65,166.87 1340.17,166.34 1344.65,166.34 Y1.1
NetC19_1: C19.1 U4.20 | length 58.1
  Layer 1 (SIG) w8: U4.20 1450.65,877.58 1473.56,877.58 1495,856.14 C19.1
NetC22_1: C22.1 U4.10 | length 64
  Layer 1 (SIG) w8: C22.1 1232.78,897.58 1289.67,897.58 U4.10
NetJ1_A5: J1.A5 R5.2 | length 264.3
  Layer 1 (SIG) w8: R5.2 144.77,634.2 207.85,571.12 229.43,571.12 J1.A5
NetJ1_B5: J1.B5 R7.2 | length 231.4
  Layer 1 (SIG) w8: R7.2 149.77,397.8 201.17,449.2 229.43,449.2 J1.B5
RESET: R6.1 RESET.2 U2.7 | length 1435.9
  Layer 1 (SIG) w8: v1(440,885) 440,954.09 RESET.2 ; U2.7 1458.9,544.21 1512.34,597.66 1514.92,600.23 1447.44,667.7 1442.3,667.7 v1(1440,670)
  Layer 4 (SIG) w8: v1(440,885) 475,850 1330,850 1440,740 v1(1440,670)
RF_ANTENNA: ANT1.1 C18.2 L3.2 | length 307.8
  Layer 1 (SIG) w18.7: L3.2 1577.32,425 C18.2 1582.85,423.63 1585.09,424.65 cw(c1581.41,366.14) 1636.13,387.18 1643.26,368.64 ccw(c1660.74,375.27) 1645.36,364.64 1650,360 ccw(c1706.16,457.24) 1704.52,344.96 ccw(c1704.66,363.66) 1704.66,344.96 1713.41,344.96 ANT1.1@1800.51,344.96
SPI_CLK: U2.22 U3.6 | length 221.6
  Layer 1 (SIG) w8: U3.6 1091.1,550 1175.62,465.47 U2.22
SPI_CS: U2.21 U3.1 | length 584.9
  Layer 1 (SIG) w8: U3.1 762.82,650 770.24,657.42 770.24,665.24 v1(803.07,698.07) ; v1(1161.48,506.48) 1161.48,503.52 1179.84,485.16 U2.21
  Layer 4 (SIG) w8: v1(803.07,698.07) 966.93,698.07 1158.52,506.48 v1(1161.48,506.48)
SPI_DI: U2.23 U3.5 | length 209.1
  Layer 1 (SIG) w8: U3.5 1110,500 1164.21,445.79 U2.23
SPI_DO: U2.24 U3.2 | length 750.7
  Layer 1 (SIG) w8: U3.2 695,600 680,585 680,445 698.9,426.1 1183.39,426.1 U2.24
SPI_HOLD: U2.19 U3.7 | length 217.9
  Layer 1 (SIG) w8: U3.7 1113.22,600 1187.38,525.84 1212.23,525.84 U2.19
SPI_WP: U2.20 U3.3 | length 509.9
  Layer 1 (SIG) w8: U3.3 763.35,550 788.35,575 1119.84,575 1188.68,506.16 1212.23,506.16 U2.20
SW: C2.1 L1.1 U1.2 | length 505.8
  Layer 1 (SIG) w25: U1.2@700.44,936.24 663.76,936.24 645,955 645,1000 660,1015 855.35,1015 C2.1 1010.19,985.35 L1.1
VDD3P3_CPU: C5.2 C6.1 C7.1 C8.1 C9.1 C10.1 C12.1 C14.1 C16.1 C20.1 C21.1 L1.2 L2.2 R3.2 R6.2 R8.2 R9.2 R10.2 U2.11 U2.17 U2.31 U2.32 U4.8 U4.13 | length 3226.3
  Layer 1 (SIG) w8: C5.2 886.65,860 R3.2 912.62,891.79 997.34,891.79 L1.2@1010,904.45 ; 1110,824.29 1110,945 1145,980 1206.3,980 1227.19,959.11 1227.19,956.16 1232.05,951.3 1237.95,951.3 1249.72,939.53 U4.8 ; U2.17 1213.54,638.19 1222.58,647.23 1223.37,647.23 1230,653.86 1230,655.43 1236.63,662.06 1241.48,662.06 1252.34,672.92 1252.34,782.34 ; 1230,782.34 1230.35,782.7 C21.1 1317.9,835 1320.79,832.11 U4.13 ; U2.11 1339.76,591.69 1339.76,654.41 C8.1 ; L2.2 1532.58,472.32 1567.32,472.32 1571.67,467.97 C14.1@1618.33,467.97 ; R10.2 1600.23,999.77 1630,970 1630,910.23 1599.01,879.24 1598.92,879.24 1589.77,870.08 1589.77,640 1590,639.77
  Layer 1 (SIG) w12: U2.31 U2.32
  Layer 1 (SIG) w25: L1.2 1010,904.45 C6.1 1012.26,847.07 1072.84,847.07 C7.1 1090.54,844.9 1110,825.45 ; 1110,824.29 1151.95,782.34 1230,782.34 1252.34,782.34 1284.92,749.77 R8.2 1368.13,749.77 ; C8.1 1340.79,655.43 1356.87,655.43 1368.13,666.69 1368.13,749.77 ; U2.32 1381.3,396.14 C10.1 1381.3,259.51 1390,250.81 v3(1390,250) ; C14.1@1618.33,467.97 1629.69,467.97 1649.31,487.59 1649.31,570 1649.31,599.58 1609.12,639.77 1590,639.77 R6.2 1514.92,639.77 1404.92,749.77 1368.13,749.77
  Layer 4 (SIG) w25: v3(1390,250) 1390.57,250.57 1400.57,250.57 1650,500 v3(1650,570)
VDD_SPI: C11.1 C13.1 U2.18 U3.8 | length 270.8
  Layer 1 (SIG) w8: U3.8 1103.08,650 1103.73,650.65 1159.35,650.65 C13.1 1160,584.23 1198.7,545.53 1212.23,545.53 U2.18
VIN: C3.1 D1.2 J1.A4-B9 J1.B4-A9 J2.2 R2.1 U1.3 | length 1875.4
  Layer 1 (SIG) w8: U1.3 704.17,895.11 R2.1
  Layer 1 (SIG) w25: J1.B4-A9 232.03,424.82 265.18,424.82 340,350 v3(345,350) ; J1.A4-B9 321.22,614.49 D1.2 370.14,663.41 384.06,663.41 530.08,809.43 559.43,809.43 v3(560,810) 560.57,810.57 560.57,861.39 595,895.81 C3.1 ; C3.1@596.3,897.6 U1.3
  Layer 4 (SIG) w25: v3(345,350) 440,350 560,470 ; v3(560,810) 560,470 ; J2.2 560,470
XIN: R1.2 U2.30 | length 115.7
  Layer 1 (SIG) w8: R1.2 1339.53,289.21 U2.30
XOUT: C4.1 U2.29 Y1.3 | length 439.7
  Layer 1 (SIG) w8: Y1.3 1194.45,52.76 1161.83,85.38 1161.83,201.83 1238.33,278.33 1238.33,283.76 1239.92,285.35 1245.35,285.35 1319.84,359.84 U2.29
pads on no net: J1. J1.A8 J1.B8 U2.4 U2.5 U2.9 U2.10 U2.12 U2.13 U2.14 U2.16 U2.27 U2.28 U4.2 U4.3 U4.4 U4.5 U4.6 U4.7 U4.12 U4.14 U4.15 U4.16 U4.17 U4.19 U4.21 U4.22 U4.25
copper on no net:
  other v2: 1348.35,888.35 1391.65,888.35 1348.35,931.65 1391.65,931.65

## Polygon pours and split planes (outlines as drawn)
GND on Layer 3 (GND) "GND_L03_P002" (solid, pour order 2): 10,1030 10,10 1725,10 1725,1030
GND on Layer 2 (GND) "GND_L02_P000" (solid, pour order 0): 10,1030 1725,1030 1725,10 10,10

## Silkscreen, mask and mechanical layers (free items; w line width, h text height)
Top Overlay:
  text "+" at 929.86,347.39 h60
  text "-" at 547.84,344.81 h60
  text "POWER" at 620,345 h60
  text "+" at 990,135 h60
  text "-" at 485,130.01 h60
Bottom Overlay:
  text "PM FIU" at 1870,370 h60 r270
  text "ESP32-DAQ" at 1760,265 h60 r270